# EAGLE board RaspiOmix (EAGLE 6.4)
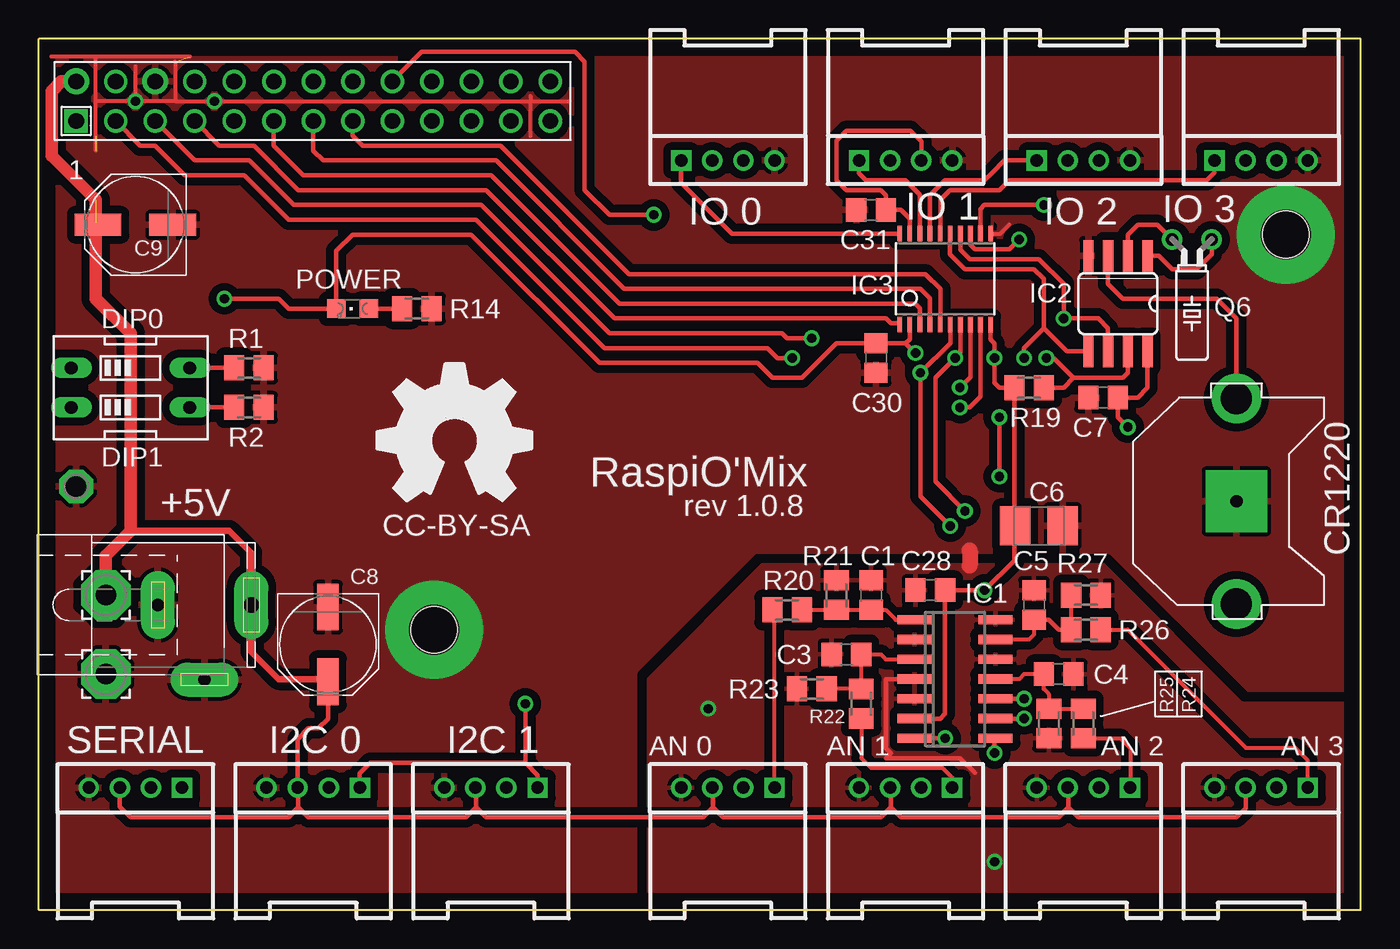
[diagram p0: board, top side]
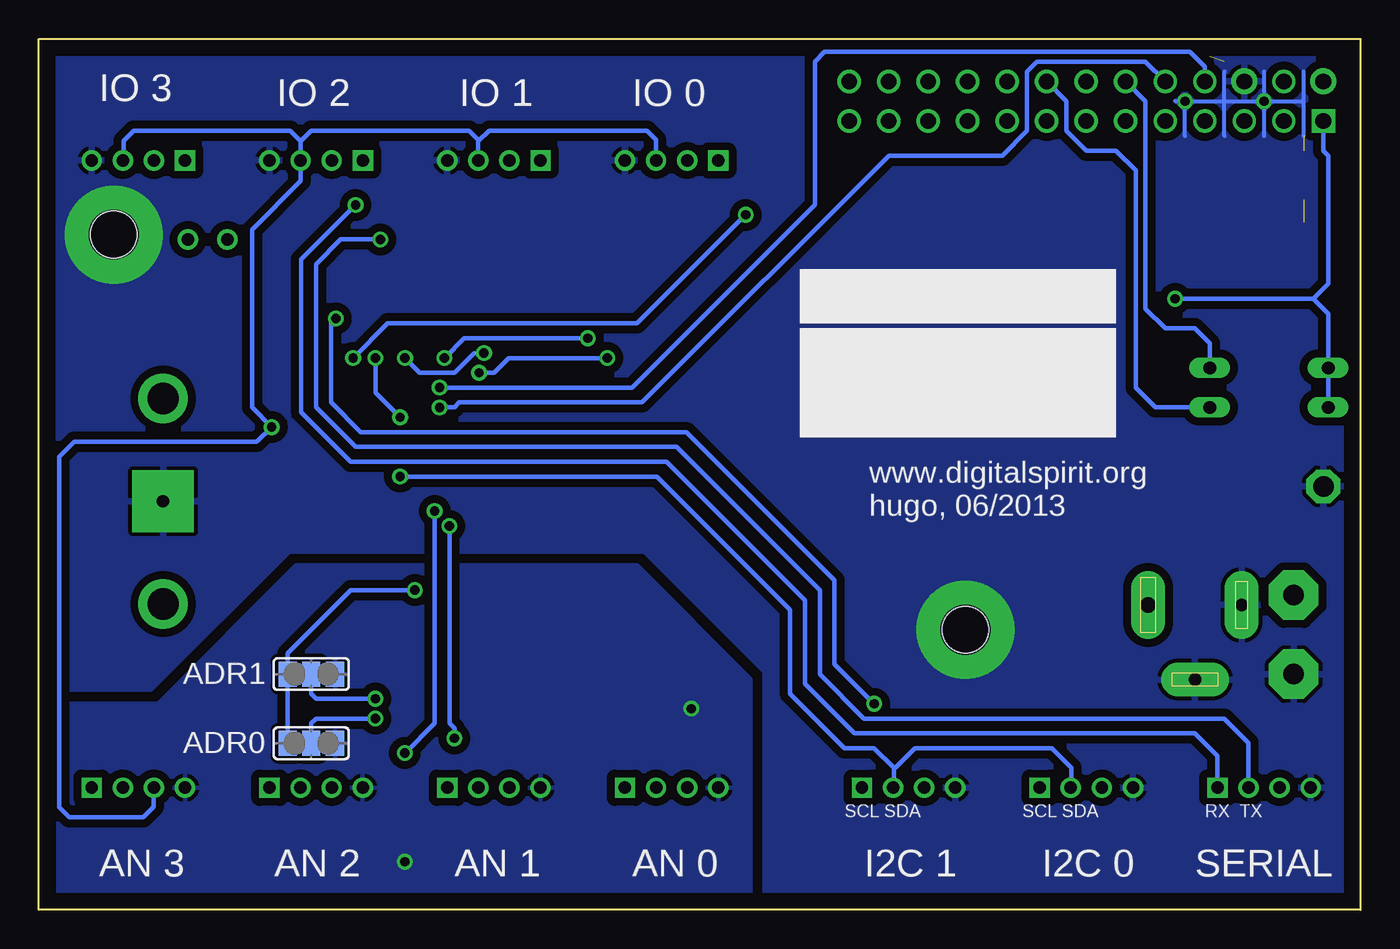
[diagram p1: board, bottom side, seen from below]

Size 85 x 56 mm. Coordinates in mm from the lower left corner, seen from the top.
Copper layers (1*16): Top 0.035mm / dielectric 1.5mm / Bottom 0.035mm
Design rules "default": minimum track width 10mil, minimum drill 24mil, track to track 8mil, track to pad 8mil, pad to pad 8mil, via to via 8mil, smd to smd 8mil, copper to edge 40mil, drill to drill 8mil, minimum pad ring 10mil, minimum via ring 8mil, stop-mask expansion 4mil, vias tented up to drill 0mil, thermal gap 10mil

## Footprints (pad centres in the part's own frame; a part is rotated, then mirrored left to right if it is on the bottom)
C0805 = smd 1.3 x 1.5: 1 -0.95,0; 2 0.95,0
B/3528-21R = smd 1.95 x 2.5: + 1.525,0; - -1.525,0
PANASONIC_D = smd 3 x 1.4: + 2.4,0; - -2.4,0
4P-2.0-90D = drill 0.8 pad 1.27 square: 1 -3,0 | drill 0.8 pad 1.27: 2 -1,0; 3 1,0; 4 3,0
CR1220-THM = drill 2 pad 3.175: +1 -6.604,0; +2 6.604,0 | drill 0.8 pad 3.962 square: - 0,0
SOIC-14 = smd 0.6 x 2.2: 1 -3.81,-2.6; 2 -2.54,-2.6; 3 -1.27,-2.6; 4 0,-2.6; 5 1.27,-2.6; 6 2.54,-2.6; 7 3.81,-2.6; 8 3.81,2.6; 9 2.54,2.6; 10 1.27,2.6; 11 0,2.6; 12 -1.27,2.6; 13 -2.54,2.6; 14 -3.81,2.6
SOIC-8 = smd 2.032 x 0.66: 1 -3.073,1.27; 2 -3.073,0; 3 -3.073,-1.27; 4 -3.073,-2.54; 5 3.073,-2.54; 6 3.073,-1.27; 7 3.073,0; 8 3.073,1.27
TSSOP20 = smd 0.305 x 0.991: 1 -2.925,-2.918; 2 -2.275,-2.918; 3 -1.625,-2.918; 4 -0.975,-2.918; 5 -0.325,-2.918; 6 0.325,-2.918; 7 0.975,-2.918; 8 1.625,-2.918; 9 2.275,-2.918; 10 2.925,-2.918; 11 2.925,2.918; 12 2.275,2.918; 13 1.625,2.918; 14 0.975,2.918; 15 0.325,2.918; 16 -0.325,2.918; 17 -0.975,2.918; 18 -1.625,2.918; 19 -2.275,2.918; 20 -2.925,2.918
SPC4077 = drill 0.8 pad 2.184 long: 1 -3,0; 2 0,-4.8 | drill 1 pad 2.184 long: 3 3,0
SJ_2 = smd 1.168 x 1.6: 1 -1.524,0; 2 0,0; 3 1.524,0
3,17/1,3 = drill 1.321 pad 3.175 octagon: 1 0,0
CHIPLED_0805 = smd 1.2 x 1.2: A 0,-1.05; C 0,1.05
TC26H = drill 0.813: 1 -1.27,0; 2 1.27,0
M0805 = smd 1.3 x 1.6: 1 -0.95,0; 2 0.95,0
EDG-02 = drill 0.813 long: 1 -1.27,-3.81; 2 1.27,-3.81; 3 1.27,3.81; 4 -1.27,3.81
P1-13 = drill 1.321 pad 2.159 octagon: TP 0,0
RASPBERRY-PI-LIGHT-HOLE = drill 1 square: 1 -39.37,22.86 | drill 1 pad 1.676: 2 -39.37,25.4; 6 -34.29,25.4 | drill 1: 3 -36.83,22.86; 4 -36.83,25.4; 5 -34.29,22.86; 7 -31.75,22.86; 8 -31.75,25.4; 9 -29.21,22.86; 10 -29.21,25.4; 11 -26.67,22.86; 12 -26.67,25.4; 13 -24.13,22.86; 14 -24.13,25.4; 15 -21.59,22.86; 16 -21.59,25.4; 17 -19.05,22.86; 18 -19.05,25.4; 19 -16.51,22.86; 20 -16.51,25.4; 21 -13.97,22.86; 22 -13.97,25.4; 23 -11.43,22.86; 24 -11.43,25.4; 25 -8.89,22.86; 26 -8.89,25.4 | hole 3: -16.351,-9.842; 38.417,15.557

## Placement (x,y rotation side)
C1  100nf  [C0805]  53.52,20.24 90 top
C3  100nf  [C0805]  51.93,16.43 180 top
C4  100nf  [C0805]  65.58,15.16 0 top
C5  100nf  [C0805]  64,19.61 90 top
C6  [B/3528-21R]  64.31,24.69 180 top
C7  100nf  [C0805]  68.44,32.95 180 top
C8  220uf  [PANASONIC_D]  18.59,17.07 270 top
C9  220uf  [PANASONIC_D]  6.21,44.06 180 top
C28  100nf  [C0805]  57.33,20.56 0 top
C30  100nf  [C0805]  53.84,35.48 270 top
C31  100nf  [C0805]  53.52,45.01 180 top
CON_AN_0  [4P-2.0-90D]  44.31,7.86 180 top
CON_AN_1  [4P-2.0-90D]  55.74,7.86 180 top
CON_AN_2  [4P-2.0-90D]  67.17,7.86 180 top
CON_AN_3  [4P-2.0-90D]  78.6,7.86 180 top
CON_I2C_0  [4P-2.0-90D]  17.64,7.86 180 top
CON_I2C_1  [4P-2.0-90D]  29.07,7.86 180 top
CON_IO_0  [4P-2.0-90D]  44.31,48.18 0 top
CON_IO_1  [4P-2.0-90D]  55.74,48.18 0 top
CON_IO_2  [4P-2.0-90D]  67.17,48.18 0 top
CON_IO_3  [4P-2.0-90D]  78.6,48.18 0 top
CON_SERIAL  [4P-2.0-90D]  6.21,7.86 180 top
CR1220  [CR1220-THM]  77.01,26.28 270 top
IC1  MCP3424-E/SL  [SOIC-14]  58.92,14.85 270 top
IC2  DS1307  [SOIC-8]  70.03,38.98 270 top
IC3  [TSSOP20]  58.28,40.56 0 top
J1  [SPC4077]  10.66,19.61 0 top
J_ADR0  [SJ_2]  67.49,10.72 180 bottom
J_ADR1  [SJ_2]  67.49,15.16 180 bottom
PAD1  [3,17/1,3]  4.31,20.24 0 top
PAD2  [3,17/1,3]  4.31,15.16 0 top
POWER  [CHIPLED_0805]  20.18,38.66 90 top
Q6  [TC26H]  74.16,43.1 180 top
R1  10k  [M0805]  13.51,34.85 180 top
R2  10k  [M0805]  13.51,32.31 180 top
R14  470  [M0805]  24.31,38.66 180 top
R19  1k  [M0805]  63.68,33.58 180 top
R20  10k  [M0805]  48.12,19.29 180 top
R21  6.8k  [M0805]  51.3,20.24 270 top
R22  10k  [M0805]  52.88,13.26 270 top
R23  6.8k  [M0805]  49.71,14.21 0 top
R24  10k  [M0805]  67.17,11.99 270 top
R25  6.8k  [M0805]  64.95,11.99 90 top
R26  10k  [M0805]  67.33,18.02 0 top
R27  6.8k  [M0805]  67.33,20.24 180 top
SW1  [EDG-02]  5.89,33.58 270 top
TP1  TPPAD1-13  [P1-13]  2.4,27.23 0 top
U$1  [OSHW_FILLX350_NOTEXT]  21.77,26.28 0 top
U$3  RASPBERRY-PILIGHT-HOLE  [RASPBERRY-PI-LIGHT-HOLE]  41.77,27.86 0 top

## Library data of the parts
C1 C3-C9 C28 C30 C31 R1 R2 R14 R19-R27 = rcl
CON_AN_0 CON_AN_1-CON_AN_3 CON_I2C_0 CON_I2C_1 CON_IO_0 CON_IO_1-CON_IO_3 CON_SERIAL = Seeedstudio_Connector
CR1220 IC3 = adafruit
IC1 IC2 = eagleParts
J1 = con-jack; OC_FARNELL: unknown; OC_NEWARK: unknown
J_ADR0 J_ADR1 = jumper
PAD1 PAD2 = wirepad
POWER = led
Q6 = crystal; OC_FARNELL: unknown; OC_NEWARK: unknown
SW1 = special
TP1 = testpad
U$1 = ohw-logo
U$3 = RaspberryPi

## Nets
+3V3: C6.+ C28.2 C30.1 IC1.6 IC3.2 IC3.10 J_ADR0.3 J_ADR1.3 POWER.C R19.2 SW1.1 SW1.2 U$3.1
+5V: C7.1 C8.+ C9.+ C31.1 CON_AN_0.3 CON_AN_1.3 CON_AN_2.3 CON_AN_3.3 CON_I2C_0.3 CON_I2C_1.3 CON_IO_0.3 CON_IO_1.3 CON_IO_2.3 CON_IO_3.3 CON_SERIAL.3 IC2.8 IC3.19 J1.3 PAD1.1 U$3.2
ADR0: IC1.9 J_ADR0.2
ADR1: IC1.10 J_ADR1.2
INTC: IC2.7 R19.1 U$3.18
IO0: CON_IO_0.1 IC3.20
IO1: CON_IO_1.1 IC3.18
IO2: CON_IO_2.1 IC3.17
IO3: CON_IO_3.1 IC3.16
N$1: CON_AN_0.1 R20.2
N$2: CON_AN_1.1 R22.2
N$3: CON_AN_2.1 R24.2
N$4: C5.1 IC1.13 R26.1 R27.2
N$5: C4.1 IC1.11 R24.1 R25.2
N$6: C3.1 IC1.3 R22.1 R23.2
N$7: C1.1 IC1.1 R20.1 R21.2
N$8: CON_AN_3.1 R26.2
N$33: IC2.1 Q6.1
N$34: IC2.2 Q6.2
N$39: POWER.A R14.2
N$58: CR1220.+1 IC2.3
PI_CE0: U$3.24
PI_CE1: U$3.26
PI_DIP0: R1.2 SW1.4 U$3.12
PI_DIP1: R2.2 SW1.3 U$3.16
PI_IO0: IC3.1 U$3.7
PI_IO1: IC3.3 U$3.11
PI_IO2: IC3.4 U$3.13
PI_IO3: IC3.5 U$3.15
PI_MISO: U$3.21
PI_MOSI: U$3.19
PI_RX: IC3.9 U$3.10
PI_SCL: IC1.8 IC3.7 U$3.5
PI_SCLK: U$3.23
PI_SDA: IC1.7 IC3.6 U$3.3
PI_TX: IC3.8 U$3.8
RX: CON_SERIAL.1 IC3.12
SCL: CON_I2C_0.1 CON_I2C_1.1 IC2.6 IC3.14
SDA: CON_I2C_0.2 CON_I2C_1.2 IC2.5 IC3.15
TX: CON_SERIAL.2 IC3.13
VSS: C1.2 C3.2 C4.2 C5.2 C6.- C7.2 C8.- C9.- C28.1 C30.2 C31.2 CON_AN_0.4 CON_AN_1.4 CON_AN_2.4 CON_AN_3.4 CON_I2C_0.4 CON_I2C_1.4 CON_IO_0.4 CON_IO_1.4 CON_IO_2.4 CON_IO_3.4 CON_SERIAL.4 CR1220.- IC1.2 IC1.4 IC1.5 IC1.12 IC1.14 IC2.4 IC3.11 J1.1 J1.2 J_ADR0.1 J_ADR1.1 PAD2.1 R1.1 R2.1 R14.1 R21.1 R23.1 R25.1 R27.1 TP1.TP U$3.6

## Tracks (layer width: path | path; a pad name or v marks a point on that pad's centre or on a via)
+3V3  (via drill 0.6, 0.6 pad 1.02)
  Top 0.254: C6.+ 62.73,24.69
  Top 0.305: v11.93,39.29 15.42,39.29 16.05,38.66 POWER.C 19.13,42.37 20.18,43.42 27.8,43.42 36.06,35.17 46.22,35.17 47.17,34.21 49.07,34.21 51.3,36.44 52.88,36.44 C30.1 55.74,36.43 55.74,36.44 | IC1.6 57.96,12.31 58.28,12.62 C28.2 v60.82,20.56 62.73,22.47 62.73,24.69 62.73,32.95 R19.2 61.77,33.58 61.46,33.9 v61.46,35.48 61.46,36.44 61.21,36.69 IC3.10 | IC3.2 56.01,36.7 55.74,36.44 | 55.74,36.44 v56.38,35.8
  Bottom 0.305: SW1.2 SW1.1 2.08,38.34 3.04,39.29 | v56.38,35.8 57.01,35.8 58.28,34.53 60.5,34.53 v61.46,35.48 | v11.93,39.29 3.04,39.29 | 3.04,39.29 2.08,40.25 2.08,48.5 2.4,48.82 U$3.1 | J_ADR0.3 J_ADR1.3 69.01,16.5 64.95,20.56 v60.82,20.56
+5V  (via drill 0.6 pad 1.02)  (1 unrouted)
  Top 0.305: IC2.8 71.3,35.58 71.3,33.58 70.66,32.95 C7.1 69.39,33.26 69.39,31.67 v70.03,31.04 | IC3.19 56.01,44.43 55.42,45.01 C31.1 | C31.1 | CON_SERIAL.3 5.21,6.64 5.89,5.96 16.05,5.96 16.69,6.59 | CON_AN_0.3 43.36,7.86 43.36,6.59 | 43.36,6.59 42.72,5.96 28.75,5.96 28.12,6.59 | 43.36,6.59 43.99,5.96 54.15,5.96 54.79,6.59 | 16.69,6.59 16.69,7.86 CON_I2C_0.3 16.64,10.99 17.32,11.67 17.96,11.67 18.59,12.31 18.59,14.53 18.45,14.67 18.22,14.67 | 16.69,6.59 17.32,5.96 27.48,5.96 28.12,6.59 | 28.12,6.59 28.12,7.81 CON_I2C_1.3 | CON_AN_1.3 54.79,7.81 54.79,6.59 | 54.79,6.59 55.42,5.96 65.58,5.96 66.22,6.59 | 66.22,6.59 66.22,7.81 CON_AN_2.3 | CON_AN_3.3 77.6,6.54 77.01,5.96 66.85,5.96 66.22,6.59 | C31.1 54.47,45.96 54.15,46.28 51.93,46.28 51.3,46.91 51.3,49.45 51.93,50.09 56.06,50.09 56.74,49.41 CON_IO_1.3
  Top 0.406: 5.89,24.37 12.24,24.37 13.66,22.96 J1.3 13.66,16.61 15.42,14.85 18.22,14.85 18.22,14.67 C8.+ 18.64,14.67
  Top 0.61: 3.67,44.2 C9.+ 3.67,43.92
  Top 0.813: PAD1.1 4.31,22.78 5.89,24.37 5.89,37.07 3.67,39.29 3.67,45.64 0.81,48.5 0.81,52.63 1.45,53.27 U$3.2
  Bottom 0.305: CON_IO_3.3 79.55,48.18 79.55,49.45 78.92,50.09 68.85,50.09 68.17,49.41 | CON_IO_0.3 45.31,49.5 45.9,50.09 56.06,50.09 56.74,49.41 CON_IO_1.3 56.74,49.5 57.33,50.09 67.49,50.09 68.17,49.41 | 68.17,49.41 CON_IO_2.3 68.17,46.87 71.3,43.74 71.3,32.31 v70.03,31.04 70.98,30.09 82.73,30.09 83.68,29.13 83.68,6.59 83.05,5.96 78.28,5.96 77.6,6.64 CON_AN_3.3 77.6,7.91
ADR0  (via drill 0.6 pad 1.02)
  Top 0.305: IC1.9 v63.36,12.31
  Bottom 0.305: v63.36,12.31 67.17,12.31 67.49,11.99 J_ADR0.2
ADR1  (via drill 0.6 pad 1.02)
  Top 0.305: IC1.10 v63.36,13.58
  Bottom 0.305: v63.36,13.58 67.17,13.58 67.49,13.89 J_ADR1.2
INTC  (via drill 0.6, 0.6 pad 1.02)
  Top 0.305: U$3.18 24.63,55.17 34.47,55.17 35.1,54.53 35.1,46.28 36.69,44.69 v39.55,44.69 | IC2.7 70.03,34.53 69.71,34.21 66.53,34.21 | R19.1 65.9,33.58 66.53,34.21 | 66.53,34.21 65.27,35.48 v64.79,35.48
  Bottom 0.305: v39.55,44.69 46.53,37.71 62.57,37.71 v64.79,35.48
IO0
  Top 0.305: IC3.20 44.57,43.48 41.31,46.74 CON_IO_0.1
IO1
  Top 0.305: IC3.18 56.66,45.98 55.72,46.91 53.2,46.91 52.74,47.38 CON_IO_1.1
IO2
  Top 0.305: IC3.17 57.31,45.94 58.28,46.91 60.82,46.91 61.31,47.41 62.09,48.18 CON_IO_2.1
IO3
  Top 0.305: IC3.16 57.96,43.49 57.96,45.64 58.6,46.28 61.77,46.28 62.41,46.91 75.11,46.91 75.6,47.41 CON_IO_3.1
N$1
  Top 0.254: CON_AN_0.1 47.31,19.15 R20.2
N$2
  Top 0.254: CON_AN_1.1 58.74,8.51 58.12,9.13 53.52,9.13 52.88,9.77 R22.2
N$3
  Top 0.254: R24.2 69.55,11.04 70.19,10.4 70.19,7.88 CON_AN_2.1
N$4
  Top 0.254: R27.2 66.38,18.34 | 66.38,18.34 66.22,18.65 | 66.22,18.34 66.22,18.65 | 66.22,18.65 R26.1 66.38,18.34 | C5.1 64,17.7 63.68,17.39 IC1.13
  Top 0.305: C5.1 64.94,18.66 65.58,18.02 R26.1
N$5
  Top 0.254: IC1.11 63.04,14.85 63.36,15.16 C4.1 64.63,14.21 64.95,13.89 R25.2 R24.1
N$6
  Top 0.254: R23.2 R22.1 C3.1 54.15,16.43 54.47,16.12 IC1.3
N$7
  Top 0.254: R20.1 50.98,19.29 R21.2 C1.1 54.47,19.29 55.11,18.66 IC1.1
  Top 0.305: IC1.1 56.38,18.66 56.37,18.66
N$8
  Top 0.254: R26.2 70.03,18.02 77.65,10.4 80.82,10.4 81.6,9.62 CON_AN_3.1
N$33
  Top 0.305: IC2.1 72.03,42.05 72.89,41.2 74.47,41.2 75.43,42.15 Q6.1
N$34
  Top 0.305: Q6.2 71.93,44.06 70.66,44.06 70.03,43.42 IC2.2
N$39
  Top 0.305: POWER.A R14.2
N$58
  Top 0.305: IC2.3 68.76,40.25 69.71,39.29 75.74,39.29 77.01,38.02 CR1220.+1
PI_DIP0
  Top 0.305: R1.2 SW1.4
  Bottom 0.305: U$3.12 13.83,51.99 13.83,38.66 12.56,37.39 10.66,37.39 9.7,36.44 SW1.4
PI_DIP1
  Top 0.305: R2.2 SW1.3
  Bottom 0.305: U$3.16 18.91,51.99 18.91,50.09 17.64,48.82 15.74,48.82 14.47,47.55 14.47,33.58 13.2,32.31 SW1.3
PI_IO0
  Top 0.305: U$3.7 11.61,49.14 13.83,49.14 16.69,46.28 28.75,46.28 37.01,38.02 54.47,38.02 54.79,37.71 55.3,37.71 IC3.1
PI_IO1
  Top 0.305: U$3.11 15.1,49.14 17.01,47.23 29.07,47.23 37.33,38.98 56.38,38.98 56.65,38.7 56.65,37.72 IC3.3
PI_IO2
  Top 0.305: IC3.4 57.31,39.32 56.69,39.93 37.64,39.93 29.39,48.18 18.28,48.18 17.64,48.82 U$3.13
PI_IO3
  Top 0.305: U$3.15 20.18,49.77 20.82,49.14 29.71,49.14 37.96,40.88 57.01,40.88 57.96,39.93 57.96,37.65 IC3.5
PI_RX  (via drill 0.6)
  Top 0.305: IC3.9 60.56,33 59.87,32.31 v59.23,32.31
  Bottom 0.305: v59.23,32.31 58.28,32.31 57.96,32.63 46.22,32.63 30.34,48.5 23.04,48.5 21.45,50.09 21.45,53.9 20.82,54.53 13.83,54.53 U$3.10
PI_SCL  (via drill 0.6)
  Top 0.305: U$3.5 10.02,48.18 13.51,48.18 16.37,45.33 28.44,45.33 36.69,37.07 47.8,37.07 48.12,36.75 v49.71,36.75 | IC3.7 59.26,35.82 v58.92,35.48 57.65,34.21 57.65,27.55 v59.55,25.64 | IC1.8 61.46,11.04 v61.46,10.08
  Bottom 0.305: v61.46,10.08 59.55,11.99 v59.55,25.64 | v49.71,36.75 57.65,36.75 v58.92,35.48
PI_SDA  (via drill 0.6)
  Top 0.305: U$3.3 6.53,49.14 7.48,49.14 9.39,47.23 13.2,47.23 16.05,44.38 28.12,44.38 36.37,36.12 46.85,36.12 47.49,35.48 v48.44,35.48 | v58.6,24.69 56.69,26.59 v56.69,34.53 58.61,36.45 IC3.6 | IC1.7 v58.28,11.04
  Bottom 0.305: v58.6,24.69 58.6,11.99 58.28,11.67 v58.28,11.04 | v48.44,35.48 54.79,35.48 55.74,34.53 v56.69,34.53
PI_TX  (via drill 0.6)
  Top 0.305: IC3.8 59.91,34.25 v59.23,33.58
  Bottom 0.305: U$3.8 10.02,54.22 10.97,55.17 34.47,55.17 35.1,54.53 35.1,45.33 46.85,33.58 v59.23,33.58
RX  (via drill 0.6)
  Top 0.305: IC3.12 60.56,45.06 60.82,45.33 v64.63,45.33
  Bottom 0.305: v64.63,45.33 68.12,41.83 68.12,31.99 64.95,28.82 44.63,28.82 35.74,19.93 35.74,14.53 32.56,11.35 10.66,11.35 9.21,9.91 CON_SERIAL.1
SCL  (via drill 0.6)
  Top 0.305: IC3.14 59.26,42.45 59.87,41.83 64.31,41.83 65.9,40.25 v65.9,38.02 68.12,38.02 68.76,37.39 IC2.6 | CON_I2C_0.1 20.64,8.8 21.29,9.45 31.29,9.45 | CON_I2C_1.1 32.07,8.67 31.29,9.45 | 31.29,9.45 v31.29,13.26
  Bottom 0.305: v31.29,13.26 33.83,15.8 33.83,21.2 43.36,30.72 64.31,30.72 66.22,32.63 66.22,37.71 v65.9,38.02
SDA  (via drill 0.6 pad 1.02)
  Top 0.305: 64.63,37.39 64.63,40.56 64,41.2 59.55,41.2 58.6,42.15 58.6,43.47 IC3.15 | IC2.5 66.12,35.9 64.63,37.39 | 64.63,37.39 63.36,36.12 v63.36,35.48 | v61.77,31.67 v61.77,27.86
  Bottom 0.305: v61.77,27.86 45.26,27.86 36.69,19.29 36.69,13.89 33.2,10.4 31.29,10.4 30.02,9.13 | v63.36,35.48 63.36,33.26 v61.77,31.67 | CON_I2C_0.2 18.59,7.86 18.59,9.13 19.86,10.4 28.66,10.4 29.93,9.13 30.02,9.13 | CON_I2C_1.2 30.02,7.86 30.02,9.13
TX  (via drill 0.6 pad 1.02)
  Top 0.305: IC3.13 59.91,42.75 60.19,42.47 62.41,42.47 v63.04,43.1
  Bottom 0.305: v63.04,43.1 65.58,43.1 67.17,41.52 67.17,32.31 64.63,29.77 43.99,29.77 34.79,20.56 34.79,15.16 31.93,12.31 8.75,12.31 7.21,10.77 CON_SERIAL.2
VSS  (via drill 0.6, 3.2 pad 6.3)  (2 unrouted)
  Top 0.254: 6.21,54.22 v6.21,51.99 | 8.75,54.53 8.75,51.99 | 8.75,51.99 v11.29,51.99 31.61,51.99 | 3.67,48.82 3.67,51.99 | 3.67,51.99 3.67,54.85 | 8.75,51.99 v6.21,51.99 | v6.21,51.99 3.67,51.99 | 9.7,54.85 0.81,54.85 | 31.61,51.99 34.15,51.99 | 31.61,49.77 31.61,51.99 | 31.61,52.31 31.61,51.99 | IC3.11 61.83,43.48 62.41,44.06
  Top 0.305: IC1.4 54.47,14.85 54.47,10.4 54.79,10.08 54.47,9.77 59.23,9.77 60.19,8.81
  Top 1.016: 59.87,23.1 59.87,22.15
  Bottom 0.254: 11.93,51.99 v11.29,51.99 | v11.29,51.99 v6.21,51.99 | v6.21,51.99 3.67,51.99 | 6.21,49.77 v6.21,51.99 | v6.21,51.99 6.21,53.9 | 8.75,49.77 8.75,53.9 | 11.29,49.77 v11.29,51.99 | 3.67,49.77 3.67,53.9
  other vias: 61.46,3.1 43.04,12.94 25.42,18.02 80.19,43.42
  pour Top (isolate 0.508): 0.5,55.17 0.5,0.56 38.28,0.56 38.28,15.32 46.06,23.1 68.92,23.1 77.81,14.21 84.63,14.21 84.63,55.17
  pour Bottom (isolate 0.508): 0.5,55.17 84.63,55.17 84.31,14.21 77.81,14.21 68.92,23.1 46.06,23.1 38.28,15.32 38.28,0.56 0.5,0.56
  pour Bottom (isolate 0.508): 39.23,0.56 84,0.56 84,13.26 77.33,13.26 68.44,22.15 46.53,22.15 39.23,14.85
  pour Top (isolate 0.508): 39.23,0.56 39.23,14.85 46.53,22.15 68.44,22.15 77.33,13.26 84,13.26 84,0.56

## Text on the board
tNames: IO 0 | IO 1 | IO 2 | IO 3 | DIP0 | DIP1 | RaspiO'Mix | +5V | rev 1.0.8 | CC-BY-SA | SERIAL | I2C 0 | I2C 1 | AN 0 | AN 1 | AN 2 | AN 3
bNames: IO 0 | IO 1 | IO 2 | IO 3 | www.digitalspirit.org / hugo, 06/2013 | ADR1 | ADR0 | TX | RX | SDA | SCL | SDA | SCL | SERIAL | I2C 0 | I2C 1 | AN 0 | AN 1 | AN 2 | AN 3